# Allegro board 2019-08-17.brd
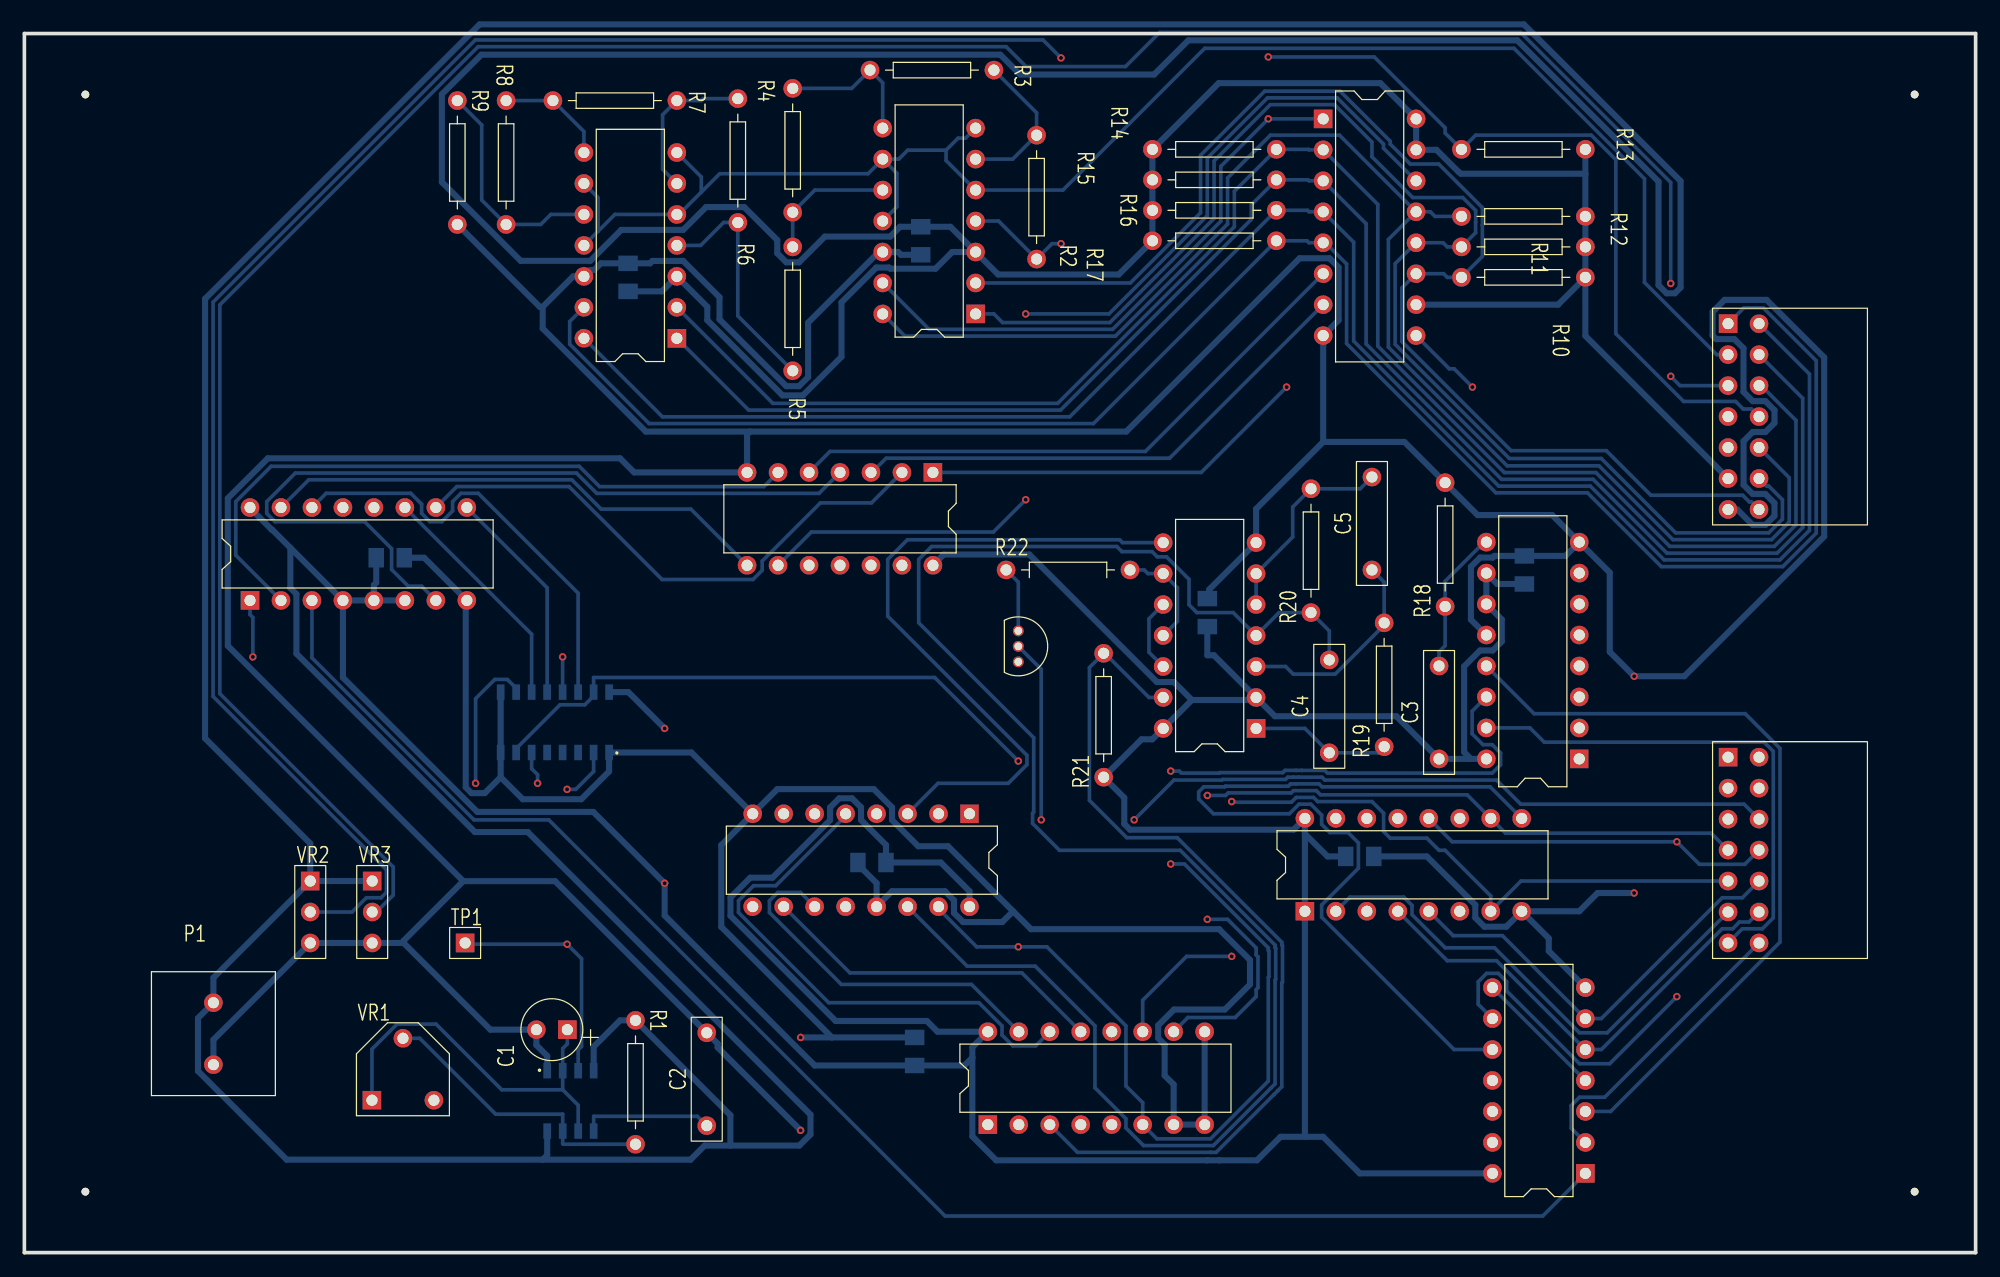
[diagram p0: board, top side]
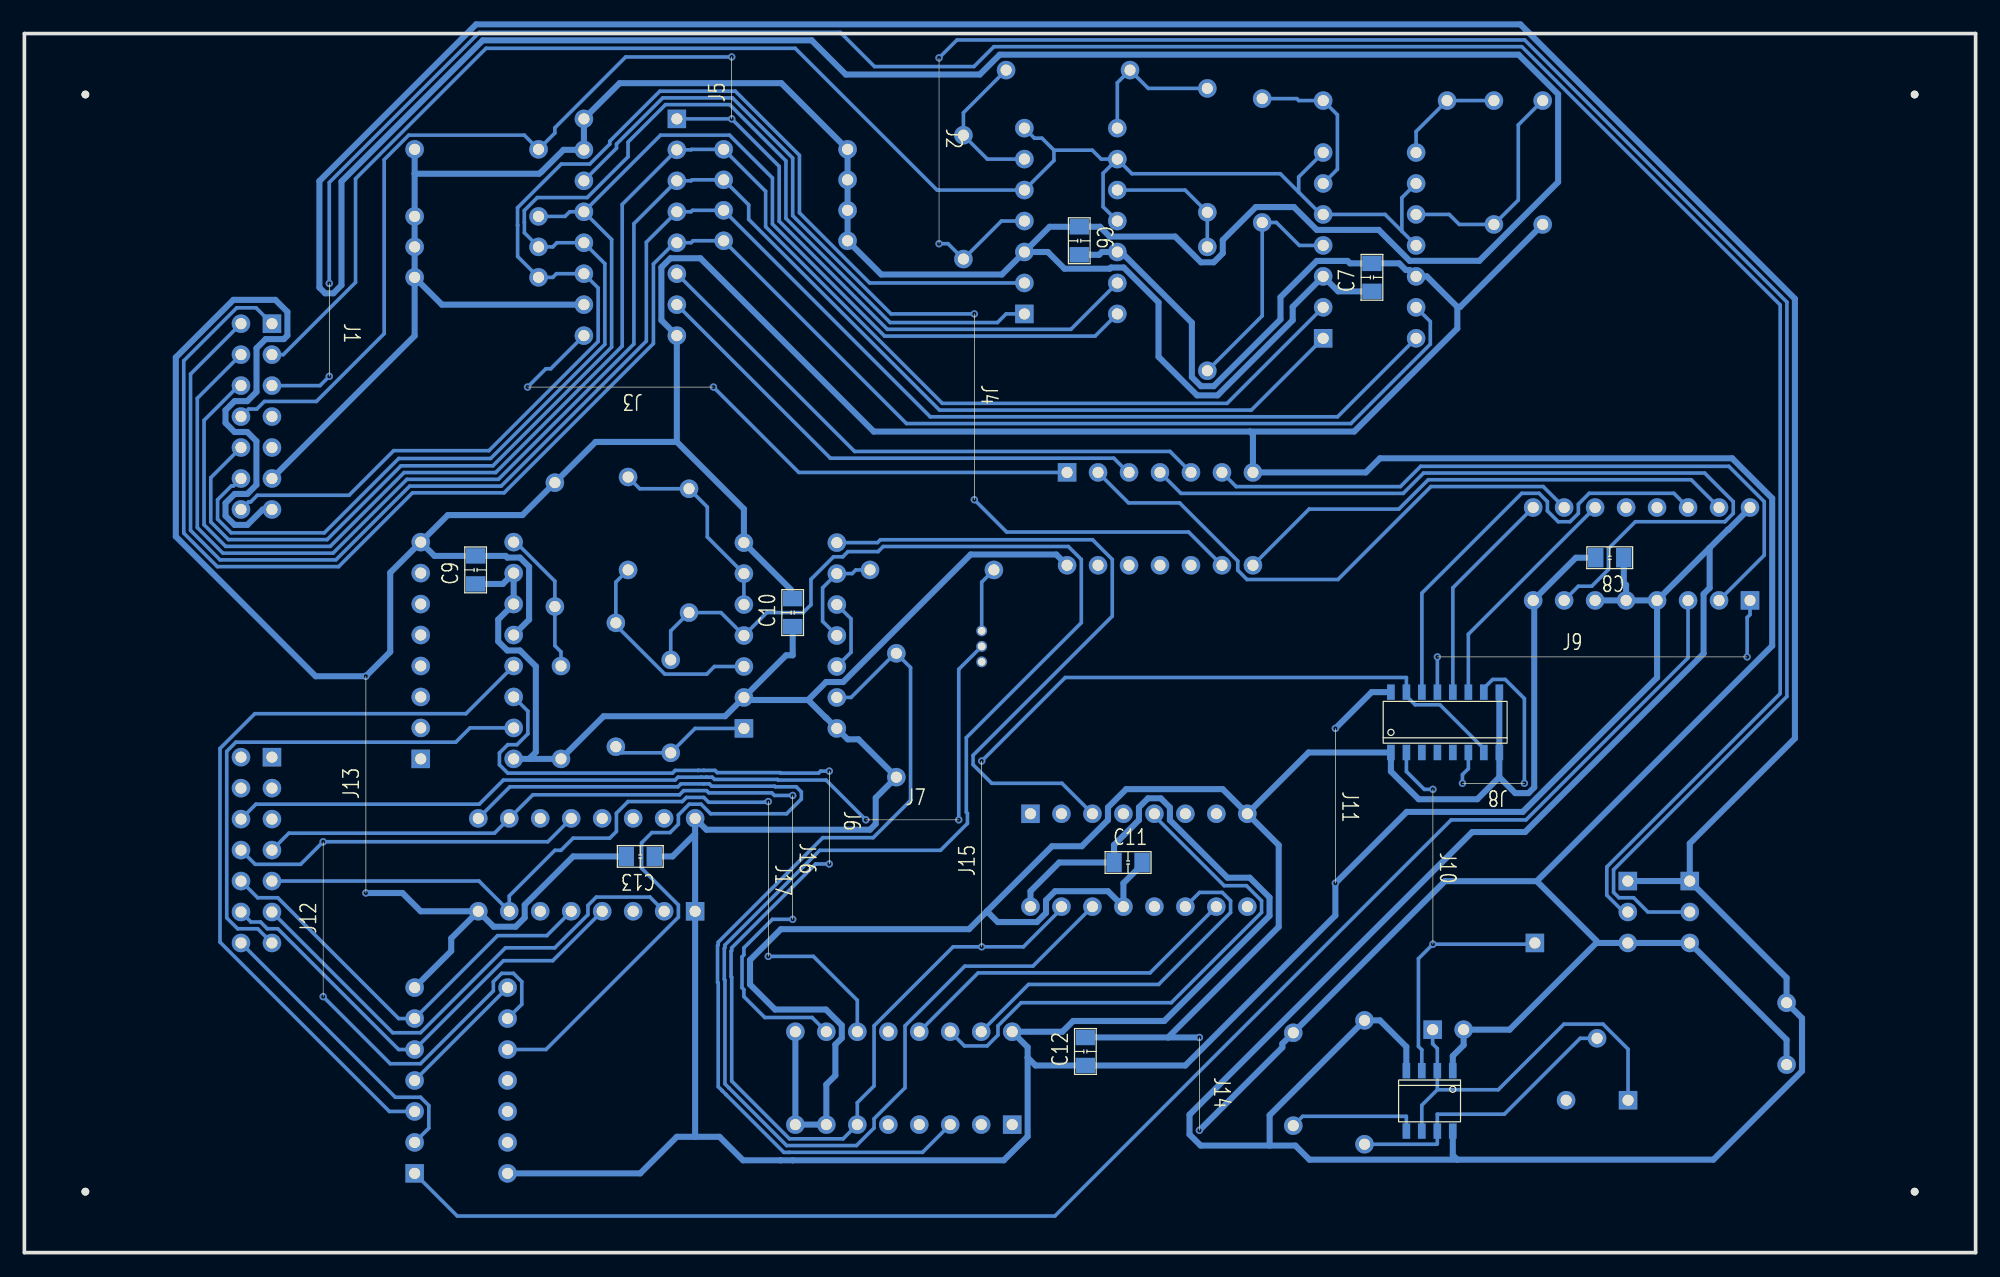
[diagram p1: board, bottom side, seen from below]

Outline 160 x 100 mm; copper layers: TOP, BOTTOM. Coordinates in mm from the lower left corner of the outline.
Outline path: 0,100 0,0 160,0 160,100 0,100

## Design rules (mm)
nets with their own width: min track width 0.5; nets +5V GND

## Placement (name value [footprint] x y rotation side)
C1  10uF  [CAP196]  44.52 18.29 90 top
C2  0.1uF  [CAP300]  55.95 10.41 90 top
C3  0.1uF  [CAP300]  116 40.5 90 top
C4  0.1uF  [CAP300]  107 41 90 top
C5  0.1uF  [CAP300]  110.5 56 90 top
C6  0.1uF  [SMDCAP]  73.5 84 270 bottom
C7  0.1uF  [SMDCAP]  49.5 79 90 bottom
C8  0.1uF  [SMDCAP]  29 57 0 bottom
C9  0.1uF  [SMDCAP]  123 55 90 bottom
C10  0.1uF  [SMDCAP]  97 51.5 90 bottom
C11  0.1uF  [SMDCAP]  70.5 32 180 bottom
C12  0.1uF  [SMDCAP]  73 15.5 90 bottom
C13  0.1uF  [SMDCAP]  108.5 32.5 0 bottom
J1  -  [J2]  135 79.5 270 bottom
J2  -  [J5]  85 98 270 bottom
J3  -  [J5]  103.5 71 0 bottom
J4  -  [J5]  82.11 77 270 bottom
J5  -  [J1]  102 93 90 bottom
J6  -  [J2]  94 39.5 270 bottom
J7  -  [J2]  91 35.5 180 bottom
J8  -  [J1]  37 38.5 0 bottom
J9  -  [J9]  44.13 48.87 180 bottom
J10  -  [J4]  44.5 38 270 bottom
J11  -  [J4]  52.5 43 270 bottom
J12  -  [J4]  135.5 21 90 bottom
J13  -  [J6]  132 29.5 90 bottom
J14  -  [J2]  63.65 17.65 270 bottom
J15  -  [J5]  81.5 25.08 90 bottom
J16  -  [J3]  97 37.5 270 bottom
J17  -  [J4]  99 37 270 bottom
NOREF  -  [unnamed]  155 5 0 top
NOREF#2  -  [unnamed]  155 95 0 top
NOREF#3  -  [unnamed]  5 5 0 top
NOREF#4  -  [unnamed]  5 95 0 top
P1  CON2  [2P]  15.5 20.5 0 top
P2  CON14  [JUMPER14]  139.7 76.2 270 top
P3  CON14  [JUMPER14]  139.7 40.64 270 top
Q1  2SC1815  [TO92]  81.5 51 0 top
R1  10K  [RES400]  50.11 19.05 270 top
R2  10K  [RES400]  83 81.5 90 top
R3  10K  [RES400]  79.5 97 180 top
R4  10K  [RES400]  63 95.5 270 top
R5  10K  [RES400]  63 82.5 270 top
R6  10K  [RES400]  58.5 84.5 90 top
R7  10K  [RES400]  53.5 94.5 180 top
R8  10K  [RES400]  39.5 94.5 270 top
R9  10K  [RES400]  35.5 94.5 270 top
R10  10K  [RES400]  128 80 180 top
R11  10K  [RES400]  128 82.5 180 top
R12  10K  [RES400]  128 85 180 top
R13  10K  [RES400]  128 90.5 180 top
R14  10K  [RES400]  92.5 90.5 0 top
R15  10K  [RES400]  92.5 88 0 top
R16  10K  [RES400]  92.5 85.5 0 top
R17  10K  [RES400]  92.5 83 0 top
R18  10K  [RES400]  116.5 53 90 top
R19  10K  [RES400]  111.5 41.5 90 top
R20  10K  [RES400]  105.5 52.5 90 top
R21  10K  [RES400]  88.5 39 90 top
R22  10K  [RES400]  80.5 56 0 top
TP1  TP  [JUMPER1]  36.14 25.4 0 top
U1  NE555  [SOIC8]  44.78 12.45 270 bottom
U2  LM339  [DIP14_3]  78 77 180 top
U3  LM339  [DIP14_3]  53.5 75 180 top
U4  40147  [DIP16_3]  106.5 93 0 top
U5  4069  [DIP14_3]  74.5 64 270 top
U6  4518  [SOIC16]  43.5 43.5 90 bottom
U7  4585  [DIP16_3]  18.5 53.5 90 top
U8  4027  [DIP16_3]  127.5 40.5 180 top
U9  4071  [DIP14_3]  128 6.5 180 top
U10  4001  [DIP14_3]  101 43 180 top
U11  4017  [DIP16_3]  77.5 36 270 top
U12  4051  [DIP16_3]  79 10.5 90 top
U13  4175  [DIP16_3]  105 28 90 top
VR1  1M  [VR1]  28.5 12.5 0 top
VR2  10K  [VR2]  23.44 27.94 0 top
VR3  10K  [VR2]  28.52 27.94 0 top

## Library data of the parts
C1 = Cap POL
C2-C5 = Cap NP
C6-C13 = Cap TEXT
J1-J17 = JUMPER
P1 = CON2
P2 P3 = CON14
Q1 = 2SC1815
R1-R22 = resistor
TP1 = TP
U1 = NE555: Tolerance: ***; User Part Number: ***
U2 U3 = LM339: Tolerance: ***; User Part Number: ***
U4 = 40147: Tolerance: ***; User Part Number: ***
U5 = 4069: Tolerance: ***; User Part Number: ***
U6 = 4518: Tolerance: ***; User Part Number: ***
U7 = 4585: Tolerance: ***; User Part Number: ***
U8 = 4027: Tolerance: ***; User Part Number: ***
U9 = 4071: Tolerance: ***; User Part Number: ***
U10 = 4001: Tolerance: ***; User Part Number: ***
U11 = 4017: Tolerance: ***; User Part Number: ***
U12 = 4051: Tolerance: ***; User Part Number: ***
U13 = 4175: Tolerance: ***; User Part Number: ***
VR1 = VR1
VR2 VR3 = VR2_0

## Footprints (pads in the part's own frame, mm; a bottom-side part is the same pattern mirrored in y, then rotated)
2P
  round 1.524 hole 0.914: 1(0,0) 2(0,-5.08)
CAP196
  rect 1.524x1.524 hole 0.914: 1(0,0)
  round 1.524 hole 0.914: 2(0,2.54)
CAP300
  round 1.524 hole 0.914: 1(0,0) 2(7.62,0)
DIP14_3
  rect 1.524x1.524 hole 0.914: 1(0,0)
  round 1.524 hole 0.914: 2(0,-2.54) 3(0,-5.08) 4(0,-7.62) 5(0,-10.16) 6(0,-12.7) 7(0,-15.24) 8(7.62,-15.24) 9(7.62,-12.7) 10(7.62,-10.16) 11(7.62,-7.62) 12(7.62,-5.08) 13(7.62,-2.54) 14(7.62,0)
DIP16_3
  rect 1.524x1.524 hole 0.914: 1(0,0)
  round 1.524 hole 0.914: 2(0,-2.54) 3(0,-5.08) 4(0,-7.62) 5(0,-10.16) 6(0,-12.7) 7(0,-15.24) 8(0,-17.78) 9(7.62,-17.78) 10(7.62,-15.24) 11(7.62,-12.7) 12(7.62,-10.16) 13(7.62,-7.62) 14(7.62,-5.08) 15(7.62,-2.54) 16(7.62,0)
JUMPER1
  rect 1.524x1.524 hole 0.914: 1(0,0)
JUMPER14
  rect 1.524x1.524 hole 0.914: 1(0,0)
  round 1.524 hole 0.914: 2(0,2.54) 3(2.54,0) 4(2.54,2.54) 5(5.08,0) 6(5.08,2.54) 7(7.62,0) 8(7.62,2.54) 9(10.16,0) 10(10.16,2.54) 11(12.7,0) 12(12.7,2.54) 13(15.24,0) 14(15.24,2.54)
RES400
  round 1.524 hole 0.914: 1(0,0) 2(10.16,0)
SMDCAP
  rect 1.27x1.6 smd: 1(-0.15,0) 2(2.15,0)
SOIC8
  rect 1.27x0.635 smd: 1(-2.477,1.905) 2(-2.477,0.635) 3(-2.477,-0.635) 4(-2.477,-1.905) 5(2.477,-1.905) 6(2.477,-0.635) 7(2.477,0.635) 8(2.477,1.905)
SOIC16
  rect 1.27x0.635 smd: 1(-2.477,4.445) 2(-2.477,3.175) 3(-2.477,1.905) 4(-2.477,0.635) 5(-2.477,-0.635) 6(-2.477,-1.905) 7(-2.477,-3.175) 8(-2.477,-4.445) 9(2.477,-4.445) 10(2.477,-3.175) 11(2.477,-1.905) 12(2.477,-0.635) 13(2.477,0.635) 14(2.477,1.905) 15(2.477,3.175) 16(2.477,4.445)
TO92
  round 0.889 hole 0.635: 1(0,0) 2(0,-1.27) 3(0,-2.54)
unnamed
  round 0.635 hole 3.175 unplated: (0,0)
VR1
  rect 1.524x1.524 hole 0.914: 1(0,0)
  round 1.524 hole 0.914: 2(2.54,5.08) 3(5.08,0)
VR2
  rect 1.524x1.524 hole 0.914: 1(0,2.54)
  round 1.524 hole 0.914: 2(0,0) 3(0,-2.54)

## Nets
+5V: C3.1 C6.1 C7.1 C8.1 C9.1 C10.1 C11.1 C12.1 C13.1 P1.1 P2.11 R1.1 R10.1 R11.1 R12.1 R13.1 R14.1 R15.1 R16.1 R17.1 R21.1 U1.4(RST) U1.8(VCC) U2.3 U3.3 U4.10(I\9\) U4.15(I\0\) U4.16(VCC) U5.14 U6.16 U7.4(A>BIN) U7.5(A<BIN) U7.6(A=BIN) U7.16(VCC) U8.10(J) U8.11(K) U8.16 U9.14 U10.2(I1) U10.14 U11.16(VCC) U12.16(VCC) U13.1(R\S\T\) U13.16(VCC) VR2.1(A) VR3.1(A)
GND: C1.2 C2.2 C6.2 C7.2 C8.2 C9.2 C10.2 C11.2 C12.2 C13.2 P1.2 P2.13 R9.2 R18.2 U1.1(GND) U2.12 U3.12 U4.8(GND) U5.7 U6.1(CLK) U6.8 U6.9(CLK) U7.8(GND) U8.8 U8.12(RST) U9.7 U10.7 U11.8(GND) U11.13(C\K\E\N\) U12.7(VEE) U12.8(GND) U12.9(C) U13.8(GND) VR2.3(WIPER) VR3.3(WIPER)
ADC0: P2.14 R10.2 U2.2(OUT) U4.11(I\1\)
ADC1: P2.12 R11.2 U2.1(OUT) U4.12(I\2\)
ADC2: P2.10 R12.2 U2.14(OUT) U4.13(I\3\)
ADC3: P2.8 R13.2 U2.13(OUT) U4.1(I\4\)
ADC4: P2.6 R14.2 U3.2(OUT) U4.2(I\5\)
ADC5: P2.4 R15.2 U3.1(OUT) U4.3(I\6\)
ADC6: P2.2 R16.2 U3.14(OUT) U4.4(I\7\)
ADC7: P2.1 R17.2 U3.13(OUT) U4.5(I\8\)
CLK: TP1.1 U1.3(OUT) U6.2(EN)
MOTOR-GND: P3.6 Q1.2(C)
MR: U6.7(CLR) U6.15(CLR) U8.14(Q\) U11.15(RST) U12.6(E\N\)
MR2: P3.13 U8.15(Q)
SW1: P3.14 U9.2(I1)
SW2: P3.12 U9.5(I0) U13.4(D0)
SW3: P3.10 U9.6(I1) U13.5(D1)
SW4: P3.8 U9.9(I1) U13.12(D2)
SWLED1: P3.11 U13.2(Q0)
SWLED2: P3.9 U12.11(A) U13.7(Q1)
SWLED3: P3.7 U12.10(B) U13.10(Q2)
VR3: P2.5 VR3.2(B)
VR-LED: P2.3 U2.5(+IN) U2.7(+IN) U2.9(+IN) U2.11(+IN) U3.5(+IN) U3.7(+IN) U3.9(+IN) U3.11(+IN)
N01821: R1.2 U1.7(DISC) VR1.2
N01825: C1.1 U1.2(TRIG) U1.6(THR) VR1.1
N01879: R2.2 R3.1 U2.6(-IN)
N01886: R2.1 U2.4(-IN) VR2.2(B)
N01929: R3.2 R4.1 U2.8(-IN)
N02004: R4.2 R5.1 U2.10(-IN)
N02079: R5.2 R6.1 U3.4(-IN)
N02154: R6.2 R7.1 U3.6(-IN)
N02229: R7.2 R8.1 U3.8(-IN)
N02304: R8.2 R9.1 U3.10(-IN)
N05133: U4.9(A\) U5.1(I)
N05160: U4.7(B\) U5.3(I)
N05172: U4.6(C\) U5.5(I)
N05184: U4.14(D\) U5.9(I)
N05202: U5.2(O) U7.10(A0)
N05214: U5.4(O) U7.7(A1)
N05226: U5.6(O) U7.2(A2)
N05238: U5.8(O) U7.15(A3)
N05506: U6.6(Q3) U6.10(EN)
N05615: U6.11(Q0) U7.11(B0)
N05627: U6.12(Q1) U7.9(B1)
N05639: U6.13(Q2) U7.1(B2)
N05651: U6.14(Q3) U7.14(B3)
N05837: C2.1 U1.5(CV)
N06039: U7.3(A=BOUT) U9.1(I0)
N06118: U8.13(CLK) U9.3(O)
N06347: C3.2 R18.1 U8.9(SET)
N12761: Q1.1(E) R22.1
N12765: Q1.3(B)
N12791: R22.2 U10.9(I1) U10.11(O)
N12870: U10.10(O) U10.12(I0)
N12949: R21.2 U10.13(I1) U12.3(X)
N13065: U9.4(O) U9.8(I0)
N13106: U9.10(O) U13.9(CLK)
N16220: U10.8(I0) U11.3(0)
N16266: U11.10(4) U12.13(X0)
N16278: U11.5(6) U12.14(X1)
N16290: U11.11(9) U12.15(X2)
N16648: C5.1 R19.2 U10.3(O)
N16662: C5.2 R20.2 U10.5(I0) U10.6(I1)
N16697: C4.1 R19.1 U10.1(I0)
N16721: C4.2 R20.1 U10.4(O) U11.14(CLK)

Pads without a net: P2 7 9; P3 1 2 3 4 5; U5 10 11 12 13; U6 3 4 5; U7 12 13; U8 1 2 3 4 5 6 7; U9 11 12 13; U11 1 2 4 6 7 9 12; U12 1 2 4 5 12; U13 3 6 11 13 14 15; VR1 3

## Via types
v1: diameter 0.61, hole 0.33, TOP to BOTTOM, 34 vias

## Routing (per net, layer and track width the routed paths; a pad name or vN(x,y) marks a point on that pad's centre or on a via; arc(x,y) is an arc through that point)
+5V: length 1048.4
  BOTTOM w0.5: U5.14 75.39,57.27 82.4,57.27 92.86,46.81 94.26,46.81 95.73,45.33 ; 21.81,57.81 20.32,59.3 20.29,59.3 18.5,61.09 U7.16 ; 21.81,57.81 U7.4 ; 21.81,57.81 21.81,54.52 22.31,54.02 22.31,49.13 36.94,34.5 41.28,34.5 64.46,11.32 64.46,9.69 63.54,8.78 57.89,8.78 ; VR3.1 VR2.1 ; VR2.1 15.5,22.54 P1.1 14.23,19.23 14.23,14.9 21.51,7.62 42.5,7.62 ; VR2.1 23.44,33.56 14.82,42.18 14.82,78.24 37.33,100.75 122.96,100.75 135.81,87.9 135.81,79.16 135.34,78.69 134.66,78.69 134,79.36 134,87.86 122.41,99.44 95.44,99.44 92.64,96.64 81.65,96.64 80.02,98.27 37.48,98.27 34.23,95.02 34.23,87.82 40.7,81.35 46.4,81.35 48.94,83.89 54.02,83.89 55.9,85.77 59.02,85.77 61.73,83.06 61.73,81.98 62.48,81.23 63.52,81.23 65.64,83.35 71,83.35 71.8,84.15 C6.1 75.93,84.15 U2.3 ; C7.1 52.27,78.85 U3.3 56,77.58 56,76.48 62.16,70.32 63.84,70.32 67,73.48 67,77.95 69.86,80.81 70.9,80.81 71,80.71 74.71,80.71 76.08,82.08 U2.3 ; 105,9.5 106.5,9.5 109.5,6.5 U9.14 ; 105,9.5 U13.1 105,34.35 ; 105,9.5 103,9.5 101.07,7.57 97.99,7.57 79.69,7.57 77.73,9.53 77.73,16 ; U11.16 77.5,29.65 75.15,32 C11.1 70.65,33.44 68.61,35.48 68.61,36.52 67.86,37.27 66.82,37.27 66.07,36.52 66.07,35.48 61.34,30.75 59.52,30.75 57.9,29.13 57.9,27.63 66.53,19 74,19 74.88,18.12 U12.16 77.73,16.85 77.73,16 ; U1.8 42.87,8 42.5,7.62 ; U10.2 100.79,45.33 95.73,45.33 ; U10.2 97.54,49 97,49 C10.1 ; U10.2 102.54,44 112.5,44 C3.1 118.61,40.5 ; U2.3 79.85,80.23 89.73,80.23 R17.1 R16.1 R15.1 R14.1 97.93,95.93 111.19,95.93 U4.16 U4.15 115.79,90.46 117.59,88.66 117.79,88.5 128,88.5 ; 77.73,16 77.08,15.35 C12.1 64.81,15.35 52.5,27.66 v1(52.5,30.3) 46.65,36.15 37.14,36.15 26.12,47.17 U7.4 ; R10.1 128,75.2 P2.11 ; R10.1 R11.1 R12.1 128,88.5 ; R10.1 125.76,77.76 U4.10 ; 105,34.35 U13.16 104.07,34.69 90.66,34.69 90.19,35.16 90.19,37.31 R21.1 91.6,42.1 92.48,42.1 U10.14 94.28,43.9 94.3,43.9 95.73,45.33 ; 105,34.35 106.85,32.5 C13.1 ; 118.61,40.5 118.06,41.05 118.06,48.09 119.36,49.39 120.4,49.39 121.15,50.14 121.15,51.93 U8.11 U8.10 120.77,54.85 C9.1 ; 118.61,40.5 U8.16 ; v1(52.5,43) 49.52,45.98 U6.16 ; 128,88.5 R13.1 ; U7.4 U7.5 ; U7.5 U7.6 ; U7.5 28.66,54.77 28.85,54.96 C8.1 ; 57.89,8.78 57.89,11.27 R1.1 48.84,19.05 46.68,16.89 46.68,14.92 ; 57.89,8.78 55.78,8.78 54.62,7.62 42.5,7.62
GND: length 681.2
  BOTTOM w0.5: 31.1,25.4 38.21,18.29 C1.2 41.98,17.02 42.87,16.13 U1.1 ; 31.1,25.4 VR3.3 VR2.3 15.5,17.46 P1.2 ; 31.1,25.4 31.1,25.59 35.99,30.47 ; 106.5,66.5 U4.8 107.77,76.49 107.77,80.82 107.02,81.57 104.57,81.57 90.35,67.35 59.5,67.35 ; 106.5,66.5 113.16,66.5 R18.2 119.16,60.5 125.28,60.5 U8.8 ; 106.5,66.5 101,61 U10.7 97.17,54.41 97.17,53.65 C10.2 ; U8.12 118.61,51.93 118.61,56.26 119.36,57.01 120.4,57.01 120.54,57.15 C9.2 126.37,57.15 U8.8 ; U11.8 54.7,41.02 U6.1 47.95,39.47 45.67,37.19 40.86,37.19 39.05,39 ; U11.8 61.74,38.02 69.65,38.02 71.15,36.52 71.15,35.48 73.29,33.34 75.73,33.34 81.07,28 ; U11.8 57.15,33.43 57.15,26.72 66.22,17.65 ; U12.9 U12.8 U12.7 94.24,13.79 93.5,14.53 93.5,17.07 92.97,17.6 92.97,18.64 94.27,19.94 98.44,19.94 100.5,22 100.5,24 97.97,26.53 82.54,26.53 81.07,28 ; 66.22,17.65 v1(63.65,17.65) ; 66.22,17.65 C12.2 ; 59.5,67.35 59.26,67.11 U5.7 50,64 48.84,65.16 19.96,65.16 16.68,61.87 16.68,49.78 35.99,30.47 ; 59.5,67.35 50.96,67.35 42.5,75.81 42.5,77.58 ; U13.8 121.51,26.73 119.72,26.73 118.97,27.48 118.97,28.53 115,32.5 C13.2 ; U13.8 127.5,28 129,29.5 v1(132,29.5) ; U13.8 125,25.78 125,24.74 U9.7 ; 39.05,39 U6.8 U6.9 ; 39.05,39 37.75,37.69 36.66,37.69 36.19,38.16 36.19,53.41 U7.8 32.78,57 C8.2 ; 42.5,77.58 42.26,77.58 R9.2 ; 42.5,77.58 45,80.08 U3.12 46.4,80.6 46.72,80.6 47.27,81.15 C7.2 51.3,81.15 51.5,81.35 54.02,81.35 57,78.37 57,76.55 62.48,71.07 63.52,71.07 64.27,71.82 64.27,76.28 70.06,82.08 U2.12 71.65,82.08 71.88,81.85 C6.2 ; U8.8 130,55.78 130,49.28 v1(132,47.28) 136.12,47.28 147.58,58.75 147.58,73.43 142.86,78.15 139.42,78.15 138.43,77.17 138.43,75.23 138.73,74.93 140.22,74.93 140.97,74.18 140.97,70.6 141.72,69.85 142.76,69.85 143.51,69.1 143.51,68.06 142.76,67.31 141.72,67.31 140.97,66.56 140.97,62.98 141.72,62.23 142.76,62.23 143.51,61.48 143.51,60.44 142.76,59.69 141.72,59.69 140.45,60.96 P2.13 ; C11.2 68.35,31.83 69.88,30.3 U11.13 71.15,29.65 75.48,29.65 76.23,28.9 76.23,27.86 76.98,27.11 80.18,27.11 81.07,28 ; 35.99,30.47 43.52,30.47 C2.2 56.85,17.14 56.85,16.83 v1(63.65,10.03)
ADC0: length 106.2
  BOTTOM w0.3: U2.2 90.69,79.54 96.45,85.3 96.45,90.02 101.7,95.27 107.89,95.27 112,91.16 112,90.93 113.64,89.29 115.98,89.29 119.56,85.71 119.56,84.28 119.55,84.27 119.55,81.71 R10.2 116.67,80 116.37,80.3 U4.11 112.95,79.13 112.95,74.74 121.91,65.78 129.72,65.78 133.37,62.13 140.9,62.13 141.44,61.58 141.62,61.58 P2.14
ADC1: length 115
  BOTTOM w0.3: U2.1 79.5,77 80.21,76.29 89.01,76.29 97.55,84.84 97.55,89.56 102.16,94.17 107.43,94.17 110.5,91.1 110.5,89.89 113.84,86.55 117.94,86.55 119.01,85.48 119.01,84.52 119,84.51 119,83.66 R11.2 116.67,82.5 116.33,82.84 U4.12 112.4,81.12 112.4,74.51 121.77,65.14 129.3,65.14 135.41,59.04 143.04,59.04 144.16,60.16 144.16,61.76 143.03,62.89 142.85,62.89 P2.12
ADC2: length 119.2
  BOTTOM w0.3: U4.13 107.83,91.67 102.18,91.67 98.66,88.15 98.66,84.38 89.47,75.18 72.2,75.18 U2.14 ; U4.13 115.29,85.38 115.67,85 R12.2 ; U4.13 111.85,83.11 111.85,74.28 121.58,64.54 129.12,64.54 135.18,58.49 143.26,58.49 144.71,59.94 144.71,63.57 P2.10
ADC3: length 109.5
  BOTTOM w0.3: U4.1 v1(102,93) 98.11,89.11 98.11,84.61 89.24,75.74 74.18,75.74 U2.13 ; P2.8 141.62,69.2 140.94,69.2 140.32,69.82 136.06,69.82 130.5,75.38 130.5,89.65 128.48,91.67 119.01,91.67 R13.2 116.5,91.84 116.5,92.27 110.69,98.08 v1(102,98.08)
ADC4: length 139.2
  BOTTOM w0.3: P2.6 142.42,71.12 145.27,68.27 145.27,59.71 143.49,57.93 134.92,57.93 128.86,63.99 121.35,63.99 110.98,74.36 110.98,85.98 U4.2 105.33,90.46 105.29,90.5 R14.2 99.22,87.06 99.22,84.15 84.73,69.67 61.37,69.67 U3.2
ADC5: length 138.3
  BOTTOM w0.3: U3.1 59.39,69.11 84.96,69.11 100.61,84.76 100.61,85.95 R15.2 105.25,88 105.33,87.92 U4.3 110.02,84.4 110.02,74.54 121.12,63.43 128.63,63.43 134.69,57.38 143.72,57.38 145.82,59.48 145.82,70.08 P2.4
ADC6: length 146.5
  BOTTOM w0.3: U3.14 52.32,68.56 85.72,68.56 R16.2 105.21,85.5 105.33,85.38 U4.4 109,82.88 109,74.77 120.89,62.88 128.4,62.88 134.46,56.82 143.95,56.82 146.38,59.25 146.38,72.06 P2.2
ADC7: length 154.4
  BOTTOM w0.3: P2.1 141,77.5 142.59,77.5 146.93,73.16 146.93,59.02 144.18,56.27 134.23,56.27 128.18,62.32 120.67,62.32 108.42,74.57 108.42,81.1 106.68,82.84 U4.5 105.33,82.84 105.17,83 R17.2 87.66,68 51.23,68 44.71,74.52 44.71,76.37 U3.13
CLK: length 23.7
  BOTTOM w0.3: U1.3 45.41,16.64 45.69,16.91 45.69,24.11 v1(44.5,25.3) 36.24,25.3 TP1.1 ; U6.2 46.67,39.47 45.21,38 v1(44.5,38)
MOTOR-GND: length 69.1
  BOTTOM w0.3: v1(83.38,35.5) 83.38,47.85 Q1.2 ; P3.6 141.01,36.79 122.7,36.79 120.72,38.76 106.64,38.76 106.4,39 104.52,39 104.06,39 103.6,39 103.41,38.82 98.25,38.82 98.19,38.76 94.26,38.76 v1(91,35.5)
MR: length 145.4
  BOTTOM w0.3: U6.7 40.33,41.34 43.92,44.94 45.95,44.94 46.67,45.66 U6.15 46.67,47.17 74.65,47.17 v1(81.5,40.32) ; v1(94,31.88) 95.12,31.88 102,25 102,24.78 102.05,24.73 102.05,22.64 102,22.58 102,14.07 97.26,9.33 92.87,9.33 U12.6 91.7,12.3 90.33,13.67 90.33,18.6 83.85,25.08 v1(81.5,25.08) 78.08,25.08 74.96,28.2 U11.15 ; U8.14 118.71,44.41 118.71,42.56 119.61,41.67 120.36,41.67 121.05,40.98 121.05,40.02 120.36,39.33 106.85,39.33 106.63,39.56 104.75,39.56 104.29,39.56 103.37,39.56 103.18,39.37 98.02,39.37 97.98,39.33 94.87,39.33 94.71,39.5 v1(94,39.5)
MR2: length 42.5
  BOTTOM w0.3: P3.13 140.87,26.57 142.51,26.57 143.41,27.46 143.41,41.12 142.66,41.87 124.63,41.87 123.46,43.04 U8.15
SW1: length 24.4
  BOTTOM w0.3: P3.14 129.59,12.75 127.52,12.75 126.83,12.06 126.83,10.21 U9.2
SW2: length 39
  BOTTOM w0.3: U13.4 116.67,23.95 120.71,23.95 U9.5 129.31,16.66 139.22,26.57 140.08,26.57 140.64,27.12 141.42,27.12 P3.12
SW3: length 35.4
  BOTTOM w0.3: U13.5 117.16,26 121.2,26 U9.6 129.31,19.2 139.22,29.11 140.87,29.11 P3.10
SW4: length 55
  BOTTOM w0.3: U13.12 117.08,33.7 v1(135.5,33.7) 137.35,31.85 141.07,31.85 P3.8 ; v1(135.5,21) 129.99,15.49 127.52,15.49 121.55,21.46 121.55,22.22 120.86,22.91 119.9,22.91 119.21,22.22 119.21,20.37 U9.9
SWLED1: length 41.8
  BOTTOM w0.3: U13.2 108.71,29.17 113.1,29.17 113.79,28.48 113.79,27.73 116.51,25 120.55,25 127.52,18.03 129.79,18.03 P3.11
SWLED2: length 58.8
  BOTTOM w0.3: P3.9 122.72,30.48 U13.7 120.24,29.26 116.5,33 116,33 115,34 112,34 111.45,34.55 111.45,36.05 110.5,37 106.05,37 105.71,37.34 104.29,37.34 103.89,36.95 99.27,36.95 99.22,37 v1(99,37) ; v1(99,24.3) 95.3,24.3 91.7,20.7 U12.11
SWLED3: length 61.9
  BOTTOM w0.3: P3.7 138.31,34.41 121.45,34.41 U13.10 118.31,37.55 106.28,37.55 105.94,37.89 104.06,37.89 103.87,37.71 98.71,37.71 98.5,37.5 v1(97,37.5) ; U12.10 95.41,19.29 99.29,19.29 101,21 101,21.57 101.15,21.73 101.15,24.27 101,24.42 101,25 98.66,27.34 v1(97,27.34)
VR3: length 204.6
  BOTTOM w0.3: v1(135,71.88) 135.76,71.12 P2.5 ; v1(135,79.5) 135,87.78 122.69,100.1 93.1,100.1 90.29,97.29 82.13,97.29 80.5,98.92 37.2,98.92 16.03,77.74 16.03,45.85 30.24,31.64 30.24,29.32 28.86,27.94 VR3.2
VR-LED: length 136.8
  BOTTOM w0.3: 47.05,83.79 48.42,85.16 U3.5 53.68,85.16 55.51,86.99 ; 47.05,83.79 U3.11 ; 47.05,83.79 47.05,86.53 U3.9 ; U2.9 71.55,88.53 71.55,85.79 U2.11 ; U2.9 69.18,88.5 57.02,88.5 55.51,86.99 ; U2.9 71.7,89.7 72.43,90.43 75.58,90.43 ; 75.58,90.43 75.58,89.58 U2.5 85.16,87.16 96.79,98.79 122.14,98.79 132.85,88.09 132.85,79.59 138.77,73.66 P2.3 ; 75.58,90.43 76.56,91.42 77.18,91.42 U2.7 ; 55.51,86.99 55.51,88.23 U3.7
N01821: length 24.1
  BOTTOM w0.3: VR1.2 32.42,17.58 38.64,11.36 44.14,11.36 44.14,8.93 44.18,8.89 R1.2
N01825: length 31.9
  BOTTOM w0.3: U1.6 45.41,12.09 44.14,13.36 ; VR1.1 28.5,16.69 30.56,18.75 33.75,18.75 39.14,13.36 44.14,13.36 ; 44.14,13.36 44.14,16.74 44.52,17.12 C1.1
N01879: length 12.6
  BOTTOM w0.3: R3.1 83,93.5 R2.2 81.04,89.7 U2.6
N01886: length 149.1
  BOTTOM w0.3: v1(85,98) 83.53,99.47 36.98,99.47 15.47,77.97 15.47,45.62 29.69,31.41 29.69,29.55 29.24,29.11 28.04,29.11 26.87,27.94 VR2.2 ; v1(85,82.76) 84.26,82.76 R2.1 79.88,84.62 U2.4
N01929: length 12.2
  BOTTOM w0.3: R4.1 67.84,95.5 R3.2 70.38,95.96 U2.8
N02004: length 11
  BOTTOM w0.3: U2.10 64.82,87.16 R4.2 R5.1
N02079: length 19.8
  BOTTOM w0.3: U3.4 55.45,82.62 57.33,84.5 R6.1 58.5,76.84 R5.2
N02154: length 12.8
  BOTTOM w0.3: U3.6 52.33,88.87 52.33,93.33 R7.1 55.5,94.5 55.66,94.66 R6.2
N02229: length 9.2
  BOTTOM w0.3: U3.8 45.88,91.96 R7.2 R8.1
N02304: length 18.5
  BOTTOM w0.3: U3.10 43.16,85.16 42.34,84.34 R8.2 37.5,86.34 37.5,92.5 R9.1
N05133: length 38.3
  BOTTOM w0.3: v1(118.74,71) 117.24,72.5 116.84,72.5 U4.9 ; U5.1 96.5,64 v1(103.5,71)
N05160: length 42.8
  BOTTOM w0.3: U5.3 69.5,64 70.67,65.17 93.91,65.17 U4.7
N05172: length 48.9
  BOTTOM w0.3: U4.6 91.92,65.72 66.06,65.72 U5.5
N05184: length 67.7
  BOTTOM w0.3: U4.14 111.45,90.59 111.45,90.93 107.66,94.72 101.93,94.72 97,89.79 97,85.07 88.93,77 v1(82.11,77) ; v1(82.11,61.76) 79.45,59.11 64.53,59.11 U5.9
N05202: length 46.2
  BOTTOM w0.3: U7.10 35.46,62.84 44.66,62.84 52.29,55.21 59.74,55.21 60.5,55.97 60.5,56.73 65.27,61.5 69.46,61.5 U5.2
N05214: length 68.2
  BOTTOM w0.3: U7.7 32.57,54.67 31.48,54.67 30.11,56.03 30.11,57.75 27.9,59.95 20.56,59.95 19.87,60.64 19.87,61.6 22.22,63.95 45.27,63.95 46.94,62.28 65.16,62.28 U5.4
N05226: length 56.5
  BOTTOM w0.3: U5.6 60.63,62.83 47.17,62.83 45.5,64.5 20.23,64.5 17.33,61.6 17.33,57.21 U7.2
N05238: length 42.1
  BOTTOM w0.3: U5.8 54.65,60.99 47.29,60.99 44.89,63.39 23.31,63.39 U7.15
N05506: length 14.3
  BOTTOM w0.3: v1(42.08,38.5) 42.08,39.21 41.59,39.69 U6.6 ; v1(37,38.5) 37,45.45 38.57,47.02 39.6,47.02 40.33,46.29 U6.10
N05615: length 19.4
  BOTTOM w0.3: U7.11 41.59,50.73 U6.11
N05627: length 17.9
  BOTTOM w0.3: U6.12 42.87,54.53 U7.9
N05639: length 7.6
  BOTTOM w0.3: U6.13 v1(44.13,48.87) ; v1(18.73,48.87) 18.73,52.1 18.5,52.33 U7.1
N05651: length 36.6
  BOTTOM w0.3: U7.14 24.75,62.29 31.68,62.29 32.57,61.4 32.57,60.64 33.26,59.95 34.22,59.95 35.11,60.84 35.11,61.6 35.8,62.29 37.21,62.29 45.41,54.09 U6.14
N05837: length 10.8
  BOTTOM w0.3: 46.68,9.97 46.68,11.18 55.19,11.18 C2.1
N06039: length 129.5
  BOTTOM w0.3: U7.3 23.58,48.78 36.87,35.5 43,35.5 75.5,3 124.5,3 U9.1
N06118: length 64.5
  BOTTOM w0.3: U8.13 123.79,44.21 141.11,44.21 143.96,41.35 143.96,25.47 130.07,11.58 U9.3
N06347: length 11.9
  BOTTOM w0.3: U8.9 119.7,58.28 116.5,55.08 R18.1 116.5,49.79 116,49.29 C3.2
N12761: length 5.4
  BOTTOM w0.3: R22.1 81.5,55 Q1.1
N12791: length 8.9
  BOTTOM w0.3: U10.11 94.55,51.79 94.55,54.53 U10.9 92.13,55.7 91.83,56 R22.2
N12870: length 6
  BOTTOM w0.3: U10.10 92.21,51.99 92.21,49.25 U10.12
N12949: length 73.6
  BOTTOM w0.3: U12.3 86.35,8.23 97.26,8.23 97.72,8.23 102.46,12.96 102.78,13.29 103.11,13.61 103.11,22.13 103.16,22.18 103.16,25.19 103.11,25.24 103.11,25.46 94.53,34.04 90.39,34.04 87.33,37.1 87.33,47.99 R21.2 88.59,49.16 92.21,45.54 U10.13
N13065: length 10.8
  BOTTOM w0.3: U9.4 U9.8
N13106: length 70
  BOTTOM w0.3: U9.10 117.23,16.66 106.37,27.52 106.37,28.52 109.39,31.53 109.39,33.61 108.55,34.45 107.06,34.45 106.37,35.14 106.37,35.9 105.48,36.79 104.52,36.79 103.73,36 97.5,36 96.29,37.21 96.29,37.79 96.71,38.21 98.42,38.21 98.48,38.26 103.64,38.26 103.83,38.45 104.29,38.45 106.17,38.45 106.41,38.21 120.19,38.21 U13.9
N16220: length 56.4
  BOTTOM w0.3: U10.8 90.04,58.24 89.81,58.47 72.41,58.47 70.79,56.86 70.79,52.21 82.21,40.79 82.21,40.03 80.68,38.5 74.92,38.5 U11.3
N16266: length 28.6
  BOTTOM w0.3: U11.10 67.69,22.95 81.79,22.95 U12.13
N16278: length 43.8
  BOTTOM w0.3: U11.5 67.34,35.82 61.62,30.1 59.79,30.1 58.55,28.86 58.55,27.9 65.95,20.5 78.27,20.5 80.17,18.6 80.17,17.84 81.06,16.95 82.91,16.95 U12.14
N16290: length 29.9
  BOTTOM w0.3: U12.15 77.66,22 66.99,22 61.09,27.9 61.09,28.86 61.78,29.55 63.63,29.55 U11.11
N16648: length 17.4
  BOTTOM w0.3: C5.1 111.5,55 R19.2 111.5,51.47 107.48,47.45 104.05,47.45 103.42,48.08 U10.3
N16662: length 16.8
  BOTTOM w0.3: U10.5 U10.6 104,58.7 104,61.16 R20.2 109.54,62.66 C5.2
N16697: length 11.5
  BOTTOM w0.3: U10.1 105,43 C4.1 111,41 R19.1
N16721: length 146.9
  BOTTOM w0.3: C4.2 107,51 R20.1 102.88,52.5 U10.4 99.12,52.5 96.14,52.5 95.5,53.14 95.5,55.23 93.66,57.07 92.9,57.07 92.47,57.5 90,57.5 89.58,57.92 74.39,57.92 73.33,56.86 73.33,51.67 82.76,42.24 82.76,36.13 82.67,36.04 82.67,35.21 84.88,33 94.78,33 102.55,25.23 102.55,25.01 102.61,24.96 102.61,22.41 102.55,22.35 102.55,13.84 102.23,13.52 97.49,8.78 91.77,8.78 90.33,10.22 90.33,10.98 87.79,13.52 87.79,18.6 82.89,23.5 77.3,23.5 U11.14
